# Altium PCB CH32FVx0xR-NFC-EVT-R0-1v2.PcbDoc
Units mil, origin at the board's own origin, x right, y up, seen from the top; angles counter-clockwise.
Board outline 2165.35 x 4488.19 mil, 2 copper layers (Top Layer, Bottom Layer); 75 components, 80 nets, 255 pads, 660 vias.
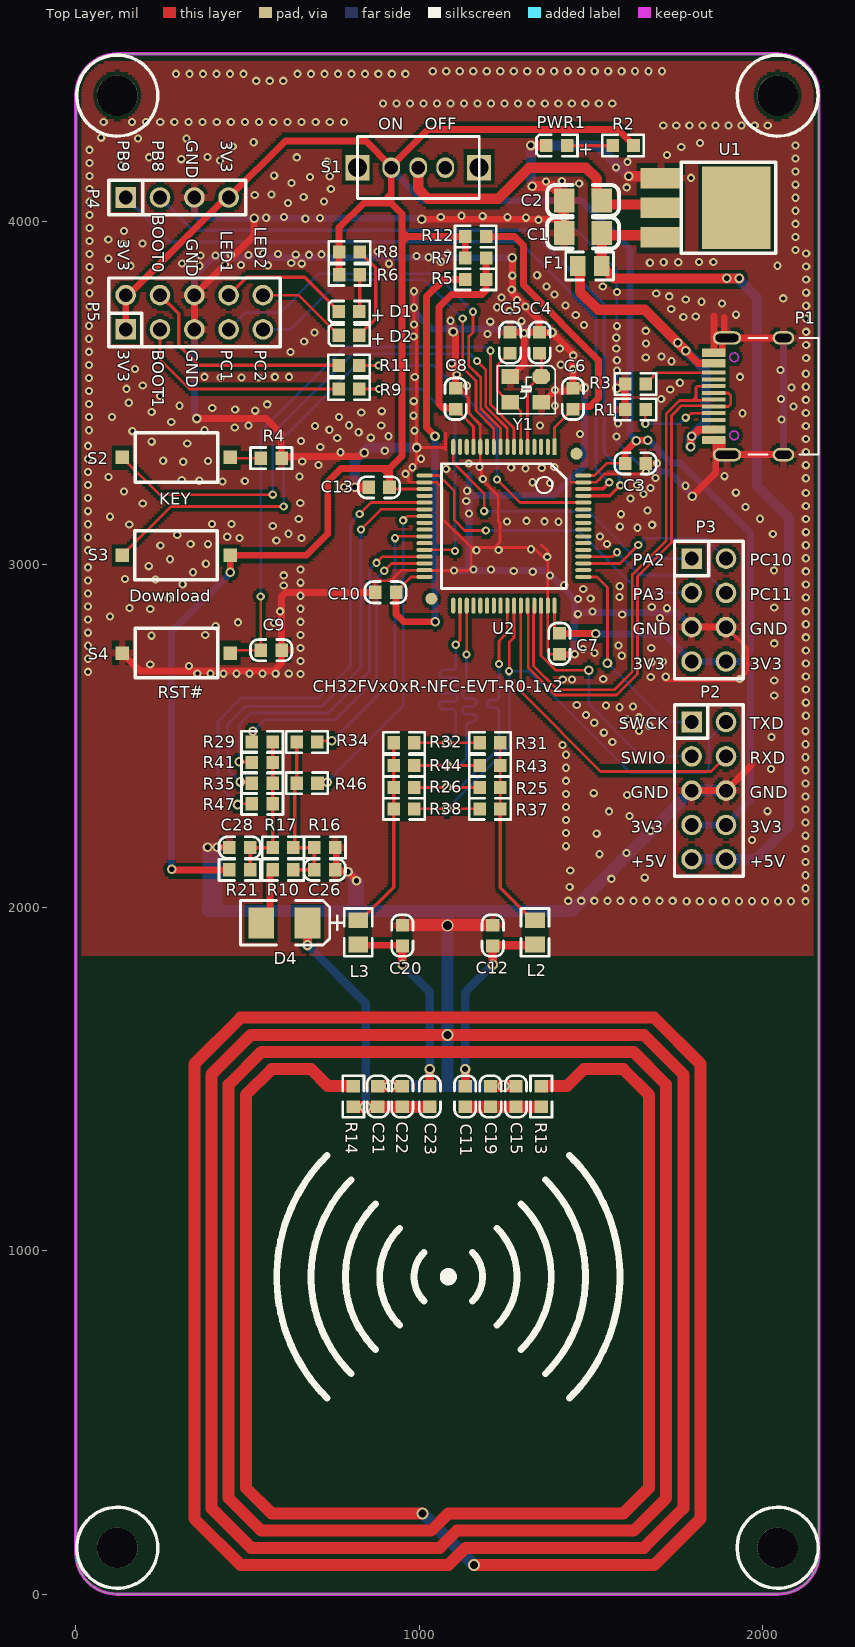
[diagram p0: Top Layer view]
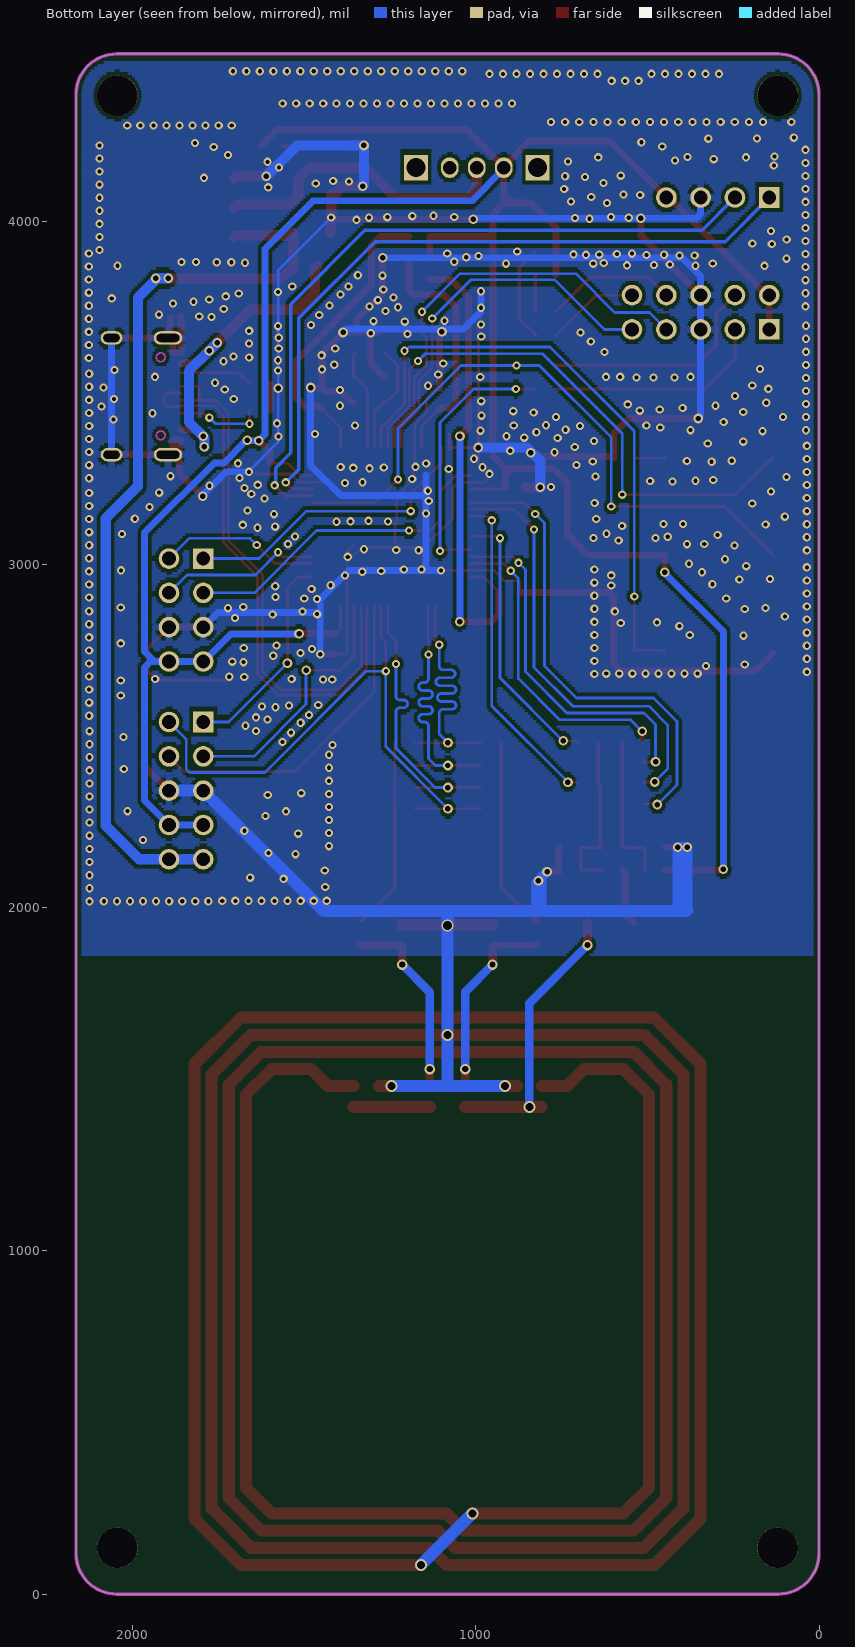
[diagram p1: Bottom Layer view, seen from below]

## Layer stack, top to bottom
Top Solder: solder mask 0.4, Solder Resist, Dk 3.5
Top Layer: signal copper 1.4
Dielectric 1: dielectric 12.6, FR-4, Dk 4.8
Bottom Layer: signal copper 1.4
Bottom Solder: solder mask 0.4, Solder Resist, Dk 3.5

## Board outline
0.08,118.11 0.08,4370.08 cw(c118.19,4370.08) 118.19,4488.19 118.11,4488.19 2047.16,4488.19 cw(c2047.16,4370.08) 2165.27,4370.08 2165.27,118.11 2165.43,118.11 cw(c2047.32,118.11) 2047.32,0 118.19,0 cw(c118.19,118.11)

## Design rules (kind name [scope] priority, off if disabled: settings)
Clearance Clearance_2 [InNet('ANT')or InNet('NetC16_2') vs InPolygon] p1: gap=6 ignorepadtopadclearanceinfootprint=FALSE
Clearance Clearance_1 [InPolygon] p2: gap=10 ignorepadtopadclearanceinfootprint=FALSE
Clearance [All] p3: gap=6 ignorepadtopadclearanceinfootprint=FALSE except(8: Arc-Via Track-Via SMDPad-Via THPad-Via Via-Via Via-Fill Via-Poly Via-Region Via-Hole)
ComponentClearance [All] p1 off: gap=10 collisioncheckmode=3 verticalgap=10 showdistances=FALSE
DiffPairsRouting [All] p1: maxlimit=10 minlimit=7 mostfreqgap=8 toplayer_minwidth=6 toplayer_maxwidth=15 toplayer_prefwidth=8 bottomlayer_minwidth=6 bottomlayer_maxwidth=15 bottomlayer_prefwidth=8 maxuncoupledlength=500
MinimumSolderMaskSliver [All] p1 off: minsoldermaskwidth=10
PolygonConnect PolygonConnect_1 [IsVia] p1: connectstyle=Direct reliefconductorwidth=10 reliefentries=4 polygonreliefangle="90 Angle" airgapwidth=10
PolygonConnect [All] p2: connectstyle=Relief reliefconductorwidth=20 reliefentries=4 polygonreliefangle="90 Angle" airgapwidth=10
RoutingVias [All] p1: holewidth=16 width=28 viastyle="Through Hole" minholewidth=12 minwidth=24 maxholewidth=28 maxwidth=50
SilkToSilkClearance [All] p1 off: silktosilkclearance=10
SilkToSolderMaskClearance [IsPad] p1 off: minsilkscreentomaskgap=10 clearancetoexposedcopper=TRUE
SolderMaskExpansion [All] p1: expansion=2 istentingtop=FALSE
Width [All] p1: maxlimit=100 minlimit=5 preferedwidth=10
25 further rules are at their usual default settings.

## Classes and differential pairs
component class CH32FVx0xR-NFC-EVT-R0-1v2: C1 C2 C3 C4 C5 C6 C7 C8 C9 C10 C11 C12 C13 C15 C19 C20 C21 C22 C23 C26 C28 D1 D2 D4 F1 L2 L3 P1 P2 P3 P4 P5 PWR1 R1 R2 R3 R4 R5 R6 R7 R8 R9 R10 R11 R12 R13 R14 R16 R17 R21 R25 R26 R29 R31 R32 R34 R35 R37 R38 R41 R43 R44 R46 R47 S1 S2 S3 S4 U1 U2 Y1
differential pair NewDifferentialPair2: +PA11 -PA12
differential pair NewDifferentialPair1: +PB6 -PB7

## Components (designator, comment, footprint, x,y, rotation, side; value= is the part's Value field where it differs from the comment)
C1 "10uF" 3216_C 1532.54,3966.48 r0 top
C2 "10uF" 3216_C 1532.54,4061.31 r0 top
C3 "0.1uF" 0603_C 1660.98,3295.06 r180 top
C4 "20pF" 0603_C 1351.2,3677.22 r270 top
C5 "20pF" 0603_C 1264.91,3677.22 r270 top
C6 "0.1uF" 0603_C 1448.21,3452.86 r90 top
C7 "0.1uF" 0603_C 1408.82,2738.85 r90 top
C8 "0.1uF" 0603_C 1106.47,3452.86 r90 top
C9 "0.1uF" 0603_C 599.29,2750.74 r180 top
C10 "0.1uF" 0603_C 872.19,2919.48 r0 top
C11 "30pF" 0603_C 1134.17,1480.3 r270 top
C12 "100pF" 0603_C 1214.69,1949.22 r270 top
C13 "0.1uF" 0603_C 853.03,3225.32 r0 top
C15 "NC" 0603_C 1282.07,1480.3 r270 top
C19 "220pf" 0603_C 1208.12,1480.3 r270 top
C20 "100pF" 0603_C 951.36,1888.59 r90 top
C21 "NC" 0603_C 879.67,1419.67 r90 top
C22 "220pf" 0603_C 951.17,1419.67 r90 top
C23 "30pF" 0603_C 1031.17,1480.3 r270 top
C26 "110pF" 0603_C 755.33,2110.47 r180 top
C28 "110p" 0603_C 447.23,2175.44 r0 top
D1 "BLUE" 0603+ 826.07,3737.33 r180 top
D2 "YELLOW" 0603+ 826.07,3668.79 r180 top
D4 "Diode BAS70WS" 3528+ 674.76,1956.12 r180 top
F1 "500mA" 0805 1461.97,3870.29 r0 top
L2 "1uH 300mΩ" 0805 1337.67,1963.2 r270 top
L3 "1uH 300mΩ" 0805 822.67,1963.2 r270 top
P1 "TYPE-C" TYPE-C-Receptacle-2.0 1859.06,3490.49 r90 top
P2 "LINK" IDC10-2.54mm 1794.35,2141.29 r0 top
P3 "Header 4X2" IDC8-2.54mm 1794.35,3017.7 r0 top
P4 "HEADER 4 母座" SIP4-2.54mm 144.94,4069.88 r90 top
P5 "HEADER 5x2" IDC10-2.54mm 544.94,3685.34 r90 top
PWR1 "POWER  red" 0603+ 1431.38,4221.23 r180 top
R1 "NC(5.1K)" 0603 1660.98,3451.94 r180 top
R2 "1K" 0603 1564.22,4221.23 r0 top
R3 "NC(5.1K)" 0603 1660.98,3526.41 r180 top
R4 "10K" 0603 599.29,3310.3 r180 top
R5 "0Ω" 0603 1134.49,3831.2 r0 top
R6 "1K" 0603 766.82,3844.68 r0 top
R7 "0Ω" 0603 1134.49,3893.73 r0 top
R8 "1K" 0603 766.82,3911.26 r0 top
R9 "10K" 0603 826.07,3511.91 r180 top
R10 "1kΩ" 0603 572.9,2110.47 r0 top
R11 "10K" 0603 765.44,3580.45 r0 top
R12 "0Ω" 0603 1134.49,3956.28 r0 top
R13 "1Ω(4.7Ω)" 0603 1356.02,1419.67 r90 top
R14 "1Ω(4.7Ω)" 0603 808.17,1419.67 r90 top
R16 "18K" 0603 755.33,2175.44 r180 top
R17 "27K" 0603 572.9,2175.44 r0 top
R21 "5100K" 0603 447.23,2110.47 r0 top
R25 "0Ω(NC)" 0603 1176.13,2350.38 r0 top
R26 "NC(0Ω)" 0603 925.76,2350.38 r0 top
R29 "NC(110k)" 0603 573.04,2483.02 r180 top
R31 "NC(0Ω)" 0603 1176.13,2480.8 r0 top
R32 "0Ω(NC)" 0603 925.76,2480.8 r0 top
R34 "20k(NC)" 0603 643.04,2483.02 r0 top
R35 "110k(NC)" 0603 573.04,2363.02 r180 top
R37 "NC(0Ω)" 0603 1176.13,2288.17 r0 top
R38 "NC(0Ω)" 0603 925.76,2288.17 r0 top
R41 "NC(110k)" 0603 573.04,2423.02 r180 top
R43 "NC(0Ω)" 0603 1176.13,2414.59 r0 top
R44 "NC(0Ω)" 0603 925.76,2414.59 r0 top
R46 "NC(20k)" 0603 643.36,2363.02 r0 top
R47 "NC(110k)" 0603 573.04,2303.02 r180 top
S1 "SW" SW1 997.5,4156.95 r180 top
S2 "KEY" SMD_6.1x3.65x2.5mm-KEY 134.73,3312.36 r0 top
S3 "Download" SMD_6.1x3.65x2.5mm-KEY 449.69,3027.36 r180 top
S4 "RST#" SMD_6.1x3.65x2.5mm-KEY 134.73,2742.35 r0 top
U1 "1117-3.3V" SOT-223 1704.58,4126.08 r270 top
U2 "CH32V203R" LQFP64M_10x10 1394.8,3343.25 r180 top
Y1 "13.56Mhz(27.12Mhz)-20pF" XT3225 1356.44,3547.86 r180 top
? "" HOLE 2044.83,4366.81 r0 top
? "" HOLE 120.36,4366.81 r0 top
? "Comment" HOLE 120.44,134.84 r0 top
? "Comment" HOLE 2044.91,134.84 r0 top

## Footprints (in the part's own frame and the unit in brackets; to place one, negate y for a bottom-side part, rotate by r counter-clockwise, add the part's x,y. Pads: shape width x height; smd on the part's side, far side on the other; paste and mask are expansions set on the pad)
0603 [mm]
  rect 0.93x0.98 smd: 1(0,0) 2(1.54,0)
  silkscreen extent -0.76,-0.79 2.3,0.79
0603+ [mm]
  rect 0.93x0.98 smd: 1(0,0) 2(1.54,0)
  silkscreen extent -0.76,-0.79 2.27,0.79
0603_C [mm]
  rect 0.93x0.98 smd mask+0.051: 1(0,0) 2(1.54,0)
  silkscreen extent -0.76,-0.79 2.31,0.79
0805 [mm]
  rect 1.16x1.47 smd: 1(0,0) 2(1.78,0)
  silkscreen extent -0.88,-1.04 2.66,1.03
3216_C [mil]
  rect 60x70 smd: 1(0,0) 2(-110,0)
  silkscreen extent -160,-45 50,45
3528+ [mil]
  rect 75x90 smd: 1(0,0) 2(135,0)
  silkscreen extent -102,-65 195,65
HOLE [mm]
  round 3 hole 3: 0(0,0)
  silkscreen extent -3,-3 3,3
IDC8-2.54mm [mil]
  rect 60x60 hole 40: 1(0,0)
  round 60 hole 40: 2(100,0) 3(0,-100) 4(100,-100) 5(0,-200) 6(100,-200) 7(0,-300) 8(100,-300)
  silkscreen extent -50,-350 150,50
IDC10-2.54mm [mil]
  rect 60x60 hole 40: 1(0,400)
  round 60 hole 40: 2(100,400) 3(0,300) 4(100,300) 5(0,200) 6(100,200) 7(0,100) 8(100,100) 9(0,0) 10(100,0)
  silkscreen extent -50,-50 150,450
LQFP64M_10x10 [mm]
  round 0.889 smd: 0(-1.619,0.508) 0(9.119,11.246)
  rect 0.3x1.2 smd mask+0.051: 1(0,0)
  oval 0.3x1.2 smd mask+0.051: 2(0.5,0) 3(1,0) 4(1.5,0) 5(2,0) 6(2.5,0) 7(3,0) 8(3.5,0) 9(4,0) 10(4.5,0) 11(5,0) 12(5.5,0) 13(6,0) 14(6.5,0) 15(7,0) 16(7.5,0) 33(7.5,11.754) 34(7,11.754) 35(6.5,11.754) 36(6,11.754) 37(5.5,11.754) 38(5,11.754) 39(4.5,11.754) 40(4,11.754) 41(3.5,11.754) 42(3,11.754) 43(2.5,11.754) 44(2,11.754) 45(1.5,11.754) 46(1,11.754) 47(0.5,11.754) 48(0,11.754)
  oval 1.2x0.3 smd mask+0.051: 17(9.627,2.127) 18(9.627,2.627) 19(9.627,3.127) 20(9.627,3.627) 21(9.627,4.127) 22(9.627,4.627) 23(9.627,5.127) 24(9.627,5.627) 25(9.627,6.127) 26(9.627,6.627) 27(9.627,7.127) 28(9.627,7.627) 29(9.627,8.127) 30(9.627,8.627) 31(9.627,9.127) 32(9.627,9.627) 49(-2.127,9.627) 50(-2.127,9.127) 51(-2.127,8.627) 52(-2.127,8.127) 53(-2.127,7.627) 54(-2.127,7.127) 55(-2.127,6.627) 56(-2.127,6.127) 57(-2.127,5.627) 58(-2.127,5.127) 59(-2.127,4.627) 60(-2.127,4.127) 61(-2.127,3.627) 62(-2.127,3.127) 63(-2.127,2.627) 64(-2.127,2.127)
  silkscreen extent -0.86,1.26 8.37,10.49
SIP4-2.54mm [mil]
  rect 60x60 hole 40: 1(0,0)
  round 60 hole 40: 2(0,-100) 3(0,-200) 4(0,-300)
  silkscreen extent -50,-350 50,50
SMD_6.1x3.65x2.5mm-KEY [mm]
  rect 1x1 smd: 1(0,0) 2(8,0)
  silkscreen extent 0.98,-1.83 7.08,1.83
SOT-223 [mil]
  rect 60x120 smd: 1(0,0) 2(86,0) 3(172,0)
  rect 240x200 smd: ""(86,220)
  silkscreen extent -47,60 219,335
SW1 [mm]
  rect 1.75x1.9 hole 1.4: 0(-4.5,0) 0(4.5,0)
  oval 1.321x1.524 hole 1.016: 1(0,0) 2(-2,0) 3(2,0)
  silkscreen extent -4.51,-2.31 4.5,2.29
TYPE-C-Receptacle-2.0 [mm]
  oval 1x1.6 hole 0.6 slot 1.2 at 90 deg: 0(-4.32,-5.15) 0(4.32,-5.15)
  oval 1x2.1 hole 0.6 slot 1.7 at 90 deg: 0(-4.32,-0.97) 0(4.32,-0.97)
  rect 0.6x1.75 smd mask+0.051: A1(-3.225,0) A4(-2.45,0) B1(3.225,0) B4(2.45,0)
  rect 0.3x1.75 smd mask+0.051: A5(-1.25,0) A6(-0.25,0) A7(0.25,0) A8(1.25,0) B5(1.75,0) B6(0.75,0) B7(-0.75,0) B8(-1.75,0)
  Keep-Out Layer circle w0.1: c2.89,-1.5 r0.325
  Keep-Out Layer circle w0.1: c-2.89,-1.5 r0.325
  silkscreen extent -4.32,-7.75 4.32,-2.55
XT3225 [mm]
  oct 1.3x1.1 smd: 1(0,0)
  rect 1.3x1.1 smd: 2(2.3,0) 3(2.3,1.9) 4(0,1.9)
  silkscreen extent -1.02,-0.8 3.27,2.74

## Part data
C1 C2 C9 C11 C12 C15 C19 C20 C21 C22 C23 C26 C28: library part CAP, "Capacitor"
C3 C4 C5 C6 C7 C8 C10 C13: library part Cap, "Capacitor"
D1 D2 PWR1: library part LED0, "Typical INFRARED GaAs LED", LatestRevisionDate=08-Jul-2005, LatestRevisionNote="Mech Layer 1 removed.", PackageReference=LED-0, Published=8-Jun-2000, Publisher="Altium Limited"
  D1 D2: PackageDescription="LED; 2 Leads"
D4: library part "Diode BAS70", "Silicon AF Schottky Diode for High-Speed Switching", ComponentLink1Description="Manufacturer Link", ComponentLink1URL=http://www.infineon.com/, ComponentLink2Description=Datasheet, ComponentLink2URL=http://www.infineon.com/upload/Document/cmc_upload/documents/009/382/bas40_bas140series_1.pdf, DatasheetVersion=Oct-1999, LatestRevisionDate=29-May-2009, LatestRevisionNote="IPC-7351 Footprint Added.", Note="Pin 2 is not connected and not drawn.", PackageDescription="3-Pin SOT-23 Package 0.95 mm Pitch, 2.5 mm Lead Span", PackageReference=SOT-23, PackageVersion=Sep-2001, Published=21-Mar-2003, Publisher="Altium Limited"
F1: library part FUSE1, "Fuse"
L2 L3: library part INDUCTOR
P1: library part TYPE-C1
P2: library part "Header 5X2H", "Header, 5-Pin, Dual row, Right Angle", LatestRevisionDate=17-Jul-2002, LatestRevisionNote="Re-released for DXP Platform.", Publisher="Altium Limited"
P3: "Header, 4-Pin, Dual row", LatestRevisionDate=17-Jul-2002, LatestRevisionNote="Re-released for DXP Platform.", Publisher="Altium Limited"
P4: library part "HEADER 4", "Header, 4-Pin"
P5: "Header, 5-Pin, Dual row"
R1 R3 R5 R7 R9 R11 R12: library part Res2, "Resistor"
R2: library part "Res Semi", "Semiconductor Resistor"
R4 R6 R8 R10 R13 R14 R16 R17 R21 R25 R26 R29 R31 R32 R34 R35 R37 R38 R41 R43 R44 R46 R47: library part RES
S2 S3 S4: library part KEY1
U2: "RISC-V HD-MCU, 10M Ethernet, 2*USB, CAN"
Y1: library part XTAL, "Crystal Oscillator", LatestRevisionDate=17-Jul-2002, LatestRevisionNote="Re-released for DXP Platform.", PackageReference=R38, Published=8-Jun-2000, Publisher="Altium Limited"

## Via types
v1: diameter 24, hole 12, Top Layer to Bottom Layer, tented both sides, 604 vias
v2: diameter 28, hole 16, Top Layer to Bottom Layer, tented both sides, 42 vias
v3: diameter 35.43, hole 23.62, Top Layer to Bottom Layer, tented both sides, 6 vias
v4: diameter 30, hole 18, Top Layer to Bottom Layer, tented both sides, 5 vias
v5: diameter 28, hole 16, Top Layer to Bottom Layer, 2 vias
v6: diameter 36, hole 26, Top Layer to Bottom Layer, tented both sides, 1 vias

## Nets (pads, with @x,y where several pads share a name; then routed paths per layer and width w, separated by ;. In a path a pad name is that pad's centre, name@x,y a point inside that pad or via, vN(x,y) a via of type N, cw(c..) or ccw(c..) an arc to the next point about the centre after c; other vN are vias at no path point)
3V3: C3.2 C7.2 C13.2 P2.7 P2.8 P3.7 P3.8 P4.4 P5.1 P5.2 R2.2 R6.1 R7.1 R8.1 R12.1 R21.1 S1.3 S3.1 U2.19 U2.48 U2.64 | length 9127
  Top Layer w8: C13.2 918.84,3220.14 U2.19 ; U2.48 1394.8,2813.49 C7.2 ; U2.64 1511.09,3259.51 1546.64,3295.06 C3.2
  Top Layer w20: P5.1 P5.2 152.67,3785.34 437.21,4069.88 P4.4 610.12,4235.06 844.65,4235.06 S1.3@918.76,4160.95 ; v2(278.76,2111.67) 279.96,2110.47 R21.1 ; v2(449.69,2977.62) S3.1 672.05,3027.36 733.58,3088.89 733.58,3241.22 772.33,3279.97 895.47,3279.97 ; R6.1 R8.1 766.82,3982.15 838.78,4054.11 893.27,4054.11 ; C13.2 913.66,3261.78 ; R7.1 R12.1 964.34,3956.28 ; C7.2 1514.04,2799.48 v2(1515.33,2798.2) ; C3.2 1600.35,3328.21 v2(1633.23,3361.09) 1634.65,3362.51 v2(1666.27,3362.51) ; R2.2 1624.85,4222.22 1579.38,4267.69 1025.49,4267.69 S1.3@918.76,4160.95 ; 893.27,4054.11 918.76,4054.11 ; 893.27,4054.11 918.76,4079.6 ; 895.47,3279.97 913.66,3279.97 ; 895.47,3279.97 913.66,3261.78 ; 913.66,3261.78 913.66,3279.97 ; 913.66,3279.97 950.47,3316.78 950.47,3940.9 ; 918.76,4054.11 918.76,4079.6 ; 918.76,4054.11 950.47,4022.4 950.47,3970.15 ; 918.76,4079.6 S1.3 S1.3@918.76,4160.95 ; 950.47,3940.9 950.47,3956.28 ; 950.47,3940.9 964.34,3954.77 964.34,3956.28 ; 950.47,3956.28 950.47,3970.15 ; 950.47,3956.28 964.34,3956.28 ; 950.47,3970.15 964.34,3956.28
  Bottom Layer w20: v2(278.76,2111.67) 278.76,2804.52 449.69,2975.45 v2(449.69,2977.62) ; S1.3 918.76,4152.95 1011.46,4060.25 1474.75,4060.25 1614.56,3920.43 1614.56,3379.75 v2(1633.23,3361.09) 1669.75,3361.09 1734.38,3296.45 1762.28,3296.45 1965.29,3093.44 1965.29,2746.38 1936.61,2717.7 ; v2(1515.33,2798.2) 1713.86,2798.2 P3.7 P3.8 1936.61,2717.7 ; P2.7 P2.8 1965.29,2312.22 1965.29,2700.06 1947.65,2717.7 1936.61,2717.7
5V_in: F1.1 P1.A4 P1.B4 | length 1015.1
  Top Layer w22: v2(1777.46,3623.1) 1813.62,3586.95 P1.B4 ; v2(1791.05,3343.34) 1791.05,3369.98 v2@1794.62,3373.56 ; v2(1794.08,3373.56) v2@1794.62,3373.56 ; P1.A4 1858.25,3393.23 1814.29,3393.23 v2@1794.62,3373.56
  Top Layer w30: F1.1 1468.74,3863.52 1468.74,3795.79 1521.85,3742.68 1657.88,3742.68 v2(1754.13,3646.43) v2(1777.46,3623.1)
  Bottom Layer w30: v2(1754.13,3646.43) v2(1777.46,3623.1) 1836.19,3564.38 1836.19,3415.66 v2(1794.08,3373.56) 1791.05,3370.52 v2(1791.05,3343.34)
+5V: C1.1 F1.2 P2.9 P2.10 U1.3 | length 2712.7
  Top Layer w30: U1.3 1698.38,3960.28 1538.74,3960.28 C1.1 1532.29,3966.24 1532.29,3870.53 F1.2 1532.05,3864.18 1539.89,3856.35 1545.99,3856.35 1568.44,3833.9 v2(1933.13,3833.9)
  Bottom Layer w22: P2.9 P2.9@1810.82,2141.29
  Bottom Layer w30: P2.9@1810.82,2141.29 1981.55,2141.29 2078.92,2238.66 2078.92,3134.52 1984.78,3228.66 1984.78,3778.33 v2@1933.13,3829.98 ; v2(1896.23,3834.86) 1928.25,3834.86 v2@1933.13,3829.98 ; v2(1933.13,3833.9) v2@1933.13,3829.98
ANT_OUT_0: L2.1 R25.2 R31.2 R37.2 R43.2 | length 563
  Top Layer w8: R37.2 R25.2 R43.2 R31.2
  Top Layer w10: R37.2 1236.76,2058.01 1331.57,1963.2 L2.1
ANT_OUT_1: L3.1 R26.1 R32.1 R38.1 R44.1 | length 563.9
  Top Layer w10: L3.1@828.78,1963.2 925.76,2060.19 R38.1 R26.1 R44.1 R32.1
  Top Layer w20: L3.1 L3.1@828.78,1963.2
BOOT0: R11.2 S3.2 U2.60 | length 1998.7
  Top Layer w8: S3.2 276.96,3169.58 v1(605.32,3169.58) ; R11.2 v1(881.95,3580.45) ; v1(1227.02,3248.2) 1294.44,3180.77 U2.60
  Bottom Layer w8: v1(605.32,3169.58) 605.32,3370.41 815.36,3580.45 v1(881.95,3580.45) 1042.78,3580.45 1227.02,3396.21 v1(1227.02,3248.2)
BOOT1: R9.1 U2.28 | length 786.9
  Top Layer w8: R9.1 829.86,3508.12 833.4,3511.66 v1(883.47,3511.66) ; U2.28 1016.31,3043.5 1100.63,3043.5 v1(1104.55,3039.57)
  Bottom Layer w8: v1(883.47,3511.66) 1006.63,3511.66 1104.36,3413.94 1104.36,3039.76 v1(1104.55,3039.57)
GND: C1.2 C2.2 C3.1 C4.1 C5.1 C6.2 C7.1 C8.2 C9.1 C10.1 C12.1 C13.1 C15.1 C19.1 C20.2 C21.2 C22.2 C26.1 C28.1 P1.0 P1.A1 P1.B1 P2.5 P2.6 P3.5 P3.6 P4.3 P5.5 P5.6 PWR1.2 R1.2 R3.2 R4.1 R13.2 R14.2 R16.1 S4.1 U1.1 U2.12 U2.18 U2.31 U2.47 U2.63 Y1.2 Y1.4 | length 39181.8
  Top Layer w8: C10.1@871.86,2919.15 C10.1 872.19,2948.04 876.88,2952.72 917.03,2952.72 948.23,2983.92 U2.31 1016.71,2982.99 v1(1101.48,2982.99) 1142.39,2982.99 1152.32,2992.93 1152.32,3049.6 ; v1(984.88,3796.81) v1(984.88,3748.48) v1(984.88,3700.15) 992.6,3692.43 992.6,3434.13 v2(992.6,3341.23) ; 1076.9,3383.21 1076.9,3334.51 1070.18,3341.23 v2(992.6,3341.23) ; C8.2@1116.45,3513.49 1130.76,3499.18 1130.76,3498.69 1143.64,3485.81 1143.64,3442.25 1178.27,3407.62 U2.12 1178.27,3287.61 v1(1175.63,3284.97) ; v1@1182.05,3284.97 1182.05,3252.92 v1(1185.68,3249.29) 1185.68,3245.39 1230.68,3200.39 1230.68,3126.26 1235.46,3121.47 1235.46,3065.55 1219.51,3049.6 ; 1356.74,3057.53 1375.12,3039.15 1375.12,3007.95 ; C7.1 1381.75,2738.85 1375.12,2745.48 U2.47 1375.12,3007.95 ; 1441.64,3239.82 U2.63 1515.45,3239.82 1539.72,3264.09 1644.01,3264.09 1648.69,3268.78 ; v2(992.6,3341.23) 992.6,3295.77 v1(980.75,3283.92) 968.91,3272.07 968.91,3244.51 973.59,3239.82 U2.18 1051.87,3239.82 1068.37,3223.32 1068.37,3133.54 1152.32,3049.6 ; 1152.32,3049.6 1219.51,3049.6 ; 1219.51,3049.6 1333.48,3049.6 1375.12,3007.95
  Top Layer w10: v1@1717.57,2662.59 1934.58,2662.59 1936.74,2662.59 1936.74,2669.19 1956.14,2688.6 1956.14,2755.91 P3.6
  Top Layer w20: S4.1 187.04,2690.05 353.65,2690.05 576.61,2690.05 599.29,2712.74 C9.1 599.29,2907.43 611.01,2919.15 C10.1@871.86,2919.15 ; P5.5 P5.6 519.15,3959.54 v2(519.15,4009.41) ; v2(351.79,3425.84) 554.44,3425.84 598.25,3382.02 598.25,3311.34 R4.1 603.96,3314.97 826.67,3314.97 837.73,3326.02 v2(839.89,3326.02) ; v2@382.65,2177.01 v2(383.44,2176.23) C28.1@446.44,2176.23 ; v2@410.69,2177.01 v2(411.47,2176.23) C28.1@446.44,2176.23 ; C28.1 C28.1@446.44,2176.23 ; R16.1 758.47,2172.3 758.47,2104.38 760,2105.91 791.12,2105.91 v2(792.65,2104.38) 817.57,2079.47 v2(817.57,2079.24) ; v2(1008.05,4006.63) 1009.05,4005.63 1010.05,4006.63 1415.78,4006.63 1420.64,4011.48 v1(1421.72,4011.48) ; C8.2 v2@1106.47,3678.44 ; Y1.2 1269.83,3547.86 1306.23,3584.27 v1(1306.23,3674.24) ; v2(1271.77,3894.2) v1(1271.77,3842.09) 1271.77,3789.97 1288.31,3773.43 1347.93,3713.81 1347.93,3680.5 C4.1@1350.7,3677.72 ; C5.1@1278.91,3677.22 1279.4,3677.72 C4.1@1350.7,3677.72 ; C4.1@1351.2,3677.72 C4.1@1350.7,3677.72 ; Y1.4 1360.38,3473.06 1392.5,3505.18 1439.91,3505.18 C6.2 v1(1448.21,3569.05) 1448.21,3609.88 1448.62,3610.29 1448.62,3611.73 1447.39,3612.97 1447.39,3616.33 v2(1387.15,3676.56) 1386.82,3676.89 1351.53,3676.89 C4.1 C4.1@1350.7,3677.72 ; C7.1 v1(1453.63,2738.85) ; C6.2@1449.5,3514.78 1480.42,3514.78 v2(1481.71,3516.07) ; v2(1576.38,3513.49) 1588.41,3513.49 R3.2@1600.35,3525.43 ; R1.2 R3.2@1600.35,3525.43 ; R3.2 R3.2@1600.35,3525.43 ; P2.5 P2.6 1969.41,2416.35 ; P3.5 P3.6 ; v2(1796.36,3199.57) 1864.46,3267.67 P1.A1@1864.46,3363.52 ; P1.A1 P1.A1@1864.46,3363.52 ; 1859.06,3724.57 P1.B1 1881.7,3617.46 1883.51,3619.27 1883.51,3651.62 1892.46,3660.57 P1.0@1897.25,3660.57 ; 1889.48,3720.36 1889.48,3668.35 P1.0@1897.25,3660.57 ; P1.0@2061.82,3320.41 1897.25,3320.41 1892.46,3320.41 1883.51,3329.36 1883.51,3361.71 1881.7,3363.52 P1.A1@1864.46,3363.52 ; P1.0@2061.82,3660.57 P1.0@1897.25,3660.57
  Top Layer w30: v2(812.58,3225.05) 852.75,3225.05 C13.1 ; v2(1326.08,4221.54) 1370.45,4221.54 PWR1.2 ; v2(1330.01,4103.19) 1389.96,4103.19 1407.54,4085.62 1407.54,4081.31 1407.7,4081.15 1421.72,4081.15 v1(1421.72,4011.48) ; C1.2 v1@1422.54,4011.48 ; v2(1610.58,4131.59) 1699.06,4131.59 U1.1
  Top Layer w35: R14.2 734.54,1480.3 685.17,1529.67 570.17,1529.67 495.17,1454.67 495.17,309.67 570.17,234.67 v3(1010.17,234.67) ; C21.2 v3(915.42,1480.3) C22.2 ; C20.2 C12.1 ; v3(1160.17,84.67) 1685.17,84.67 1820.17,219.67 1820.17,1544.67 1685.17,1679.67 480.17,1679.67 345.17,1544.67 345.17,219.67 480.17,84.67 1085.17,84.67 1135.17,134.67 1655.17,134.67 1770.17,249.67 1770.17,1514.67 1655.17,1629.67 v3(1082.67,1629.67) 510.17,1629.67 395.17,1514.67 395.17,249.67 510.17,134.67 1060.17,134.67 1110.17,184.67 1625.17,184.67 1720.17,279.67 1720.17,1484.67 1625.17,1579.67 540.17,1579.67 445.17,1484.67 445.17,279.67 540.17,184.67 1035.17,184.67 1085.17,234.67 1595.17,234.67 1670.17,309.67 1670.17,1454.67 1595.17,1529.67 1480.17,1529.67 1430.8,1480.3 R13.2 ; C19.1 C15.1
  Bottom Layer w8: v1(1421.72,4011.48) 1576.14,3857.06 1576.14,3694.86 1576.14,3629.92 1576.14,3513.49 1576.14,3357.04 1660.98,3272.2 v1(1660.98,3270.45)
  Bottom Layer w20: P4.3 344.94,4021.13 356.66,4009.41 v2(519.15,4009.41) 1005.27,4009.41 v2(1008.05,4006.63) ; v2(351.79,3425.84) 344.94,3432.68 P5.5 P5.6 344.94,3840.71 398.43,3894.2 434.65,3894.2 480.69,3894.2 589.09,3894.2 640.57,3894.2 679.28,3894.2 992.18,3894.2 v2(1271.77,3894.2) ; v1(984.88,3796.81) v1(984.88,3748.48) 984.88,3737.95 1036.39,3686.44 1377.27,3686.44 v2(1387.15,3676.56) ; v1(1101.48,2982.99) 1145.6,2982.99 ; 1145.6,3261.41 v1@1145.6,3189.41 ; v1(1453.63,2738.85) v1@1453.63,2860.25 ; v2(1481.71,3516.07) 1481.71,3289.38 1393.45,3201.12 1157.32,3201.12 v1@1145.6,3189.41 ; v1(1660.98,3270.45) 1727.93,3270.45 1768.63,3229.76 v1(1776.57,3229.76) ; v1@1771.08,3227.31 1796.36,3202.02 v2(1796.36,3199.57) ; P3.5 1751.8,2860.25 1504.99,2860.25 v1@1453.63,2860.25 ; P1.0@2061.82,3320.41 P1.0@2061.82,3660.57 ; 1145.6,2982.99 1369.48,2982.99 1453.63,2898.84 v1@1453.63,2860.25 ; 1145.6,2982.99 v1@1145.6,3189.41
  Bottom Layer w30: 383.44,1993.76 v2(383.44,2176.23) v2(411.47,2176.23) 411.47,1992.88 409.56,1990.97 ; v2(792.65,2104.38) 808.52,2088.52 808.52,1990.97 ; v2(812.58,3225.05) 812.58,3302.39 851.42,3341.23 v2(992.6,3341.23) ; v2(817.57,2079.24) 824.77,2072.03 824.77,1990.97 ; v2(1330.01,4103.19) 1326.08,4107.12 v2(1326.08,4221.54) 1520.64,4221.54 v2(1610.58,4131.59)
  Bottom Layer w35: 383.44,1993.76 386.23,1990.97 409.56,1990.97 808.52,1990.97 824.77,1990.97 1082.67,1990.97 ; v3(915.42,1480.3) 1082.67,1480.3 ; v3(1010.17,234.67) v3(1160.17,84.67) ; v3@1245.65,1480.3 1082.67,1480.3 ; P2.6 P2.5 1444.03,1990.97 1082.67,1990.97 ; 1082.67,1480.3 v3(1082.67,1629.67) v6(1082.67,1948.12) 1082.67,1990.97
  other v1: 1779.67,2018.9 1817.73,2018.9 1855.79,2018.9 1893.86,2018.9 1931.92,2018.9 1969.98,2018.9 2008.05,2018.9 2046.11,2018.9 2084.17,2018.9 2126.02,2018.78 1434.5,2020.23 1472.56,2020.23 1510.62,2020.23 1548.69,2020.23 1586.75,2020.23 1624.81,2020.23 1662.88,2020.23 1700.94,2020.23 1739,2020.23 2126.02,2056.84 1438.8,2060.35 1560.21,2084.29 1657.69,2087.71 2126.02,2094.91 1440.51,2108.23 2126.02,2132.97 1526.01,2156.11 1604.68,2159.53 2126.02,2171.03 1427.92,2179.55 1970.07,2197.84 2126.02,2210.19 1517.46,2215.97 1427.92,2217.62 1674.79,2224.52 2126.02,2248.26 1427.92,2255.68 1613.23,2267.27 1553.37,2280.95 2014.94,2281.59 2126.02,2286.32 1427.92,2293.74 2126.02,2324.38 1606.39,2328.84 1427.92,2331.81 1508.91,2333.97 2126.02,2362.45 1427.92,2369.87 2126.02,2400.51 2025.91,2404.23 1427.92,2407.93 2126.02,2438.57 1427.92,2446 1418.06,2474.19 2126.02,2476.64 1563.17,2483.02 2026.91,2497.95 1538.43,2510.36 1640.57,2514.96 2126.02,2514.7 1671.03,2530.56 1510.52,2539.13 1607.19,2548.91 1641.09,2554.99 2126.99,2559.65 1486.07,2561.57 1583.74,2584.37 1623.5,2586.5 1544.36,2589.36 1459.47,2590.74 2126.99,2597.71 2034.88,2618.77 2126.99,2635.78 2034.88,2662.46 1418.51,2665.39 1445.74,2665.39 1536.79,2666.51 1934.58,2667.03 1674.99,2672.55 1718.64,2673.3 2126.99,2673.84 654.69,2680.93 353.65,2682.24 391.71,2682.24 429.77,2682.24 467.84,2682.24 505.9,2682.24 543.96,2682.24 582.03,2682.24 620.09,2682.24 35.41,2687.49 329.1,2704.46 216.51,2708.86 2126.99,2711.91 1677,2715.78 1710.08,2717.19 654.69,2718.99 35.41,2725.55 1590.52,2734.42 1510.97,2742.49 2126.99,2749.97 1477.68,2754.16 654.69,2757.06 1676.49,2756.99 35.41,2763.62 1581.19,2764.27 2034.88,2770.58 2126.99,2788.03 219.98,2792.88 376.77,2794.61 654.69,2795.12 35.41,2801.68 407.08,2820.6 2126.99,2826.1 577.73,2830.13 472.05,2831.86 654.69,2833.18 35.41,2839.74 1701.84,2844.45 99.57,2849.19 1592.12,2854.42 1462.56,2855.63 1504.99,2863.11 595.06,2863.91 2126.99,2864.16 216.51,2870.84 654.69,2871.25 155.88,2873.44 1722.73,2873.16 2034.88,2874.95 1677.87,2876.57 35.41,2877.81 1463.02,2900 270.23,2900.89 1499.99,2901.05 2126.99,2904.29 1584.17,2905.53 654.69,2909.31 35.41,2915.87 1478.53,2929 1584.75,2936.9 605.45,2939.28 1423.13,2939.9 2126.99,2942.35 310.93,2942.74 654.69,2947.37 35.41,2953.93 232.1,2956.6 142.88,2958.33 1381.19,2968.03 605.45,2968.73 341.21,2977.6 1331.07,2979.28 2126.99,2980.41 1275.83,2981.32 2034.38,2983.32 654.69,2985.44 1158.7,2985.42 1209.85,2985.42 35.41,2992 212.18,2995.58 378.5,3002.51 273.68,3015.5 2126.99,3018.48 1373.52,3022.75 35.41,3041.68 1166.79,3042.02 1231.88,3042.96 1325.95,3044.75 245.96,3055.35 2126.99,3056.54 334.34,3060.03 384.56,3059.68 1547.34,3059.99 583.93,3070.34 657.21,3077.21 476.38,3077.87 35.41,3079.74 440.87,3081.34 1527.33,3082.29 295.34,3086.54 2030.92,3089.22 619.43,3089.8 2126.99,3094.6 1636.13,3107.51 1584.98,3110.64 573.63,3112.7 1679.27,3115.91 155.38,3116.96 35.41,3117.81 396.17,3118.43 453.41,3118.43 1256.39,3125.56 1406.25,3125.05 1365.33,3126.07 1313.16,3127.6 649.2,3133.31 2126.99,3132.67 1993.85,3133.68 99.58,3139.79 1588.29,3147.02 1145.29,3148.67 35.41,3155.87 1665.69,3157.78 1951.09,3167.54 2126.99,3170.73 194.69,3177.84 653.78,3179.96 1137.47,3185.41 1616.2,3192.92 35.41,3193.93 1654.31,3205.96 2126.99,3208.79 1922.99,3209.69 140.16,3213.35 1140.06,3215.3 1674.37,3223.51 781.25,3225.97 35.41,3232 1635.75,3232.54 1381.34,3237.66 1330.17,3240.06 426.97,3242.19 359.57,3244.5 492.07,3243.92 308.3,3246.23 2126.98,3251.81 1688.87,3252.79 94.5,3255.2 651.26,3256.49 1889.72,3257.75 960.62,3264.49 35.41,3270.06 1078.88,3278.91 1309.82,3280.61 1357.31,3281.97 1268.21,3283.32 1393.95,3284.68 706.73,3290 2126.98,3289.88 1144.85,3294.69 1693.29,3295.12 312.82,3299.78 659.35,3300.4 385.16,3302.07 254.19,3302.83 35.41,3308.12 1005.34,3308.7 770.87,3327.56 2126.98,3327.94 899.74,3331.97 711.98,3343.04 35.41,3346.19 324.24,3353.09 220.68,3358.42 655.88,3359.92 2126.98,3366 761.56,3368.89 859.13,3369.94 1575.35,3373.06 910.81,3374.16 1469.19,3380.45 823.79,3385.76 164.34,3388.87 986.84,3390.43 38.14,3391.76 374.49,3391.92 738.35,3393.15 462.82,3399.53 696.9,3403.83 2126.98,3404.07 889.72,3405.28 1352.33,3405.44 503.18,3405.63 795.84,3406.33 1579.57,3411.67 277.79,3415.53 2056.27,3423.29 38.14,3429.82 104.94,3429.99 766.25,3429.84 983.75,3434.13 1942.58,3441.14 2126.98,3442.13 831.54,3443.13 220.68,3444.46 891.06,3447.17 522.43,3448.76 464.03,3452.1 397.29,3456.27 2091.04,3460.87 301.35,3462.94 1396.03,3463.12 557.47,3467.11 38.14,3467.89 153.67,3471.87 984.27,3476.28 2126.98,3480.19 2054.39,3482.48 1705.44,3483.01 244.62,3491.31 38.14,3505.95 1396.03,3508.71 1731.95,3510.26 147.58,3512.23 2085.4,3516.31 2126.98,3518.26 1139.76,3521.12 194.57,3522.17 1759.94,3530.15 38.14,3544.01 421.11,3544.99 482.08,3545.56 532.22,3545.56 374.39,3547.27 579.52,3547.27 620.54,3547.27 987.16,3546.75 1935.06,3547.32 1109.72,3553.79 2126.98,3556.32 1576.89,3565.5 2053.45,3567.05 172.04,3569.73 38.14,3582.08 1412.84,3582.42 1095.11,3585.8 1735.41,3592.75 1576.31,3595.67 2127.95,3602.24 1660.65,3603.96 1706.04,3606.63 1449.39,3609.88 625.1,3619.3 38.14,3620.14 1409.76,3630.17 1574.57,3629.92 2127.95,3640.3 1661.19,3644.54 664.99,3650.04 38.14,3658.21 1574.57,3661.25 984.22,3665.04 1199.16,3671.78 694.9,3676.63 2127.95,3678.37 1660.65,3681.39 1576.88,3694.86 38.14,3696.27 1480.69,3698.55 1207.27,3708.01 1298.2,3709.53 1091.43,3710.76 2127.95,3716.43 1770.08,3721.44 1806.06,3723.18 1456.39,3727.81 1923.29,3728.4 1263.53,3739 1734.68,3744.65 1226.82,3749.97 1309.85,3751.89 39.51,3752.79 2127.95,3754.49 1426.49,3755.35 1882.66,3760.9 1822.89,3766.13 1285.61,3770.73 1777.04,3772.51 2061.14,3776.01 1240.17,3778.57 1728.87,3781.8 1394.52,3787.32 1691.15,3790.5 39.51,3790.85 2127.95,3792.56 1576.95,3794.63 1269.73,3801.4 1371.19,3810.65 1535.26,3810.84 39.51,3828.91 2127.95,3830.62 1343.99,3843.17 39.51,3866.98 2127.95,3868.69 159.17,3870.75 359.78,3870.92 2044.63,3870.93 559.25,3872.15 480.69,3873.38 434.65,3874.6 309.56,3877.51 658.07,3877.06 911.89,3877.02 627.38,3878.9 1672.45,3879.63 1712.65,3881.08 1755.29,3881.08 1857.5,3881.57 1062.92,3882.54 1815.84,3882.05 95.04,3891.63 1027.94,3895.65 992.18,3899.13 362.38,3900.57 406.89,3900.67 502.79,3902.19 451.3,3903.2 640.57,3903.28 679.28,3902.78 715.47,3904.29 39.51,3905.04 589.09,3905.22 545.18,3906.22 1083.39,3907 2127.95,3906.75 879.41,3912.52 2097.06,3916.95 137.54,3934.13 194.21,3935.62 39.51,3943.1 94.3,3947.55 2097.06,3955.01 139.78,3972.16 39.51,3981.17 2097.06,3993.08 1347.97,4004.78 668.5,4007.79 711.46,4010.25 554.34,4010.86 1311.37,4011.06 1257.95,4012.53 605.9,4012.7 1063.01,4013.21 1185.21,4015.51 1123.8,4016.7 39.51,4019.23 2097.06,4031.14 618.17,4053.82 39.51,4057.3 722.51,4058.12 2097.06,4069.2 663.59,4071.62 521.2,4077.15 569.69,4078.37 39.52,4094.67 742.77,4094.95 1605.2,4099.43 2097.06,4107.27 1466.54,4110.31 627.99,4112.13 1369.83,4116.37 1415.97,4118.16 1792.32,4127.17 682,4129.32 739.7,4131.77 39.52,4132.73 577.66,4133.61 2097.06,4145.33 1573.92,4157.27 131.68,4163.13 39.52,4170.8 1607.56,4173.8 731.72,4174.74 419.39,4177.95 306.8,4181.68 2097.06,4183.39 212.85,4186.9 643.34,4187.01 383.6,4187.64 130.09,4189.13 1722.08,4193.87 39.52,4208.86 1763.99,4216.89 456.67,4218.21 2097.06,4221.46 1818.88,4228.7 517.82,4230.89 322.46,4241.33 180.79,4242.07 73.42,4244.31 1711.46,4279.38 1749.52,4279.38 1787.58,4279.38 1825.65,4279.38 1863.71,4279.38 1901.77,4279.38 1939.84,4279.38 1977.9,4279.38 2015.97,4279.38 80.71,4290.14 163.09,4290.14 204.28,4290.14 245.47,4290.14 286.66,4290.14 327.85,4290.14 369.04,4290.14 410.23,4290.14 451.42,4290.14 492.61,4290.14 533.8,4290.14 574.99,4290.14 616.18,4290.14 657.37,4290.14 698.57,4290.14 739.76,4290.14 780.95,4290.14 894.68,4343.58 934,4343.58 973.32,4343.58 1012.63,4343.58 1051.95,4343.58 1091.26,4343.58 1130.58,4343.58 1169.89,4343.58 1209.21,4343.58 1248.53,4343.57 1287.84,4343.57 1327.16,4343.57 1366.47,4343.57 1405.79,4343.57 1445.11,4343.57 1484.42,4343.57 1523.74,4343.57 1563.05,4343.57 525.57,4409.8 564.88,4409.8 604.2,4409.8 291.55,4430.29 330.86,4430.29 370.18,4430.29 409.49,4430.29 448.81,4430.29 488.12,4430.29 645.39,4430.29 684.7,4430.29 724.02,4430.29 763.33,4430.29 802.65,4430.29 841.97,4430.29 881.28,4430.29 920.6,4430.29 959.91,4430.29 1039.82,4437.75 1079.13,4437.75 1118.45,4437.75 1157.76,4437.75 1197.08,4437.75 1236.39,4437.75 1275.71,4437.75 1315.03,4437.75 1354.34,4437.75 1393.66,4437.75 1432.97,4437.75 1472.29,4437.75 1511.61,4437.75 1550.92,4437.75 1590.24,4437.75 1629.55,4437.75 1668.87,4437.75 1708.18,4437.75
  other v2: 1098.8,3678.44
  other v3: 1245.65,1480.83
LED1: D1.2 P5.8 | length 384.2
  Top Layer w10: P5.8 497.16,3837.56 666.19,3837.56 765.44,3738.31 D1.2
LED2: D2.2 P5.10 | length 269.3
  Top Layer w8: P5.10 648.9,3785.34 750.15,3684.09 751.13,3684.09 765.44,3669.78 D2.2
NetC2_1: C2.1 S1.1 U1.2 | length 895.4
  Top Layer w30: S1.1 997.5,4095 1025.89,4066.61 1230.65,4066.61 1321.04,4157 1485.98,4157 1517.54,4125.45 1517.54,4076.31 1544.52,4049.33 1695.33,4049.33 U1.2
NetC11_1: C11.1 C12.2 L2.2 | length 566.5
  Top Layer w25: C11.1 v4(1134.17,1529.67) ; v4(1214.69,1834.22) C12.2 1216.96,1890.86 1335.41,1890.86 L2.2
  Bottom Layer w25: v4(1134.17,1529.67) 1134.17,1753.7 v4(1214.69,1834.22)
NetC11_2: C11.2 C15.2 C19.2 R13.1 | length 221.8
  Top Layer w35: C11.2 C15.2 R13.1
NetC20_1: C20.1 C23.1 L3.2 | length 574.2
  Top Layer w20: L3.2 824.94,1890.86 949.1,1890.86 C20.1
  Top Layer w25: v4(951.36,1834.22) C20.1 ; C23.1 v4(1031.17,1529.67)
  Bottom Layer w25: v4@949.73,1835.86 1031.17,1754.41 v4(1031.17,1529.67)
NetC21_1: C21.1 C22.1 C23.2 D4.1 R14.1 | length 829.5
  Top Layer w25: v4(674.76,1891.12) D4.1
  Top Layer w35: R14.1 v3(843.92,1419.67) C21.1 C22.1 C23.2
  Bottom Layer w25: v4(674.76,1891.12) 843.92,1721.96 v3(843.92,1419.67)
NetD1_1: D1.1 R6.2 | length 107.9
  Top Layer w10: D1.1 827.45,3738.7 R6.2
NetD2_1: D2.1 R8.2 | length 280.9
  Top Layer w10: D2.1 826.07,3669.78 873.16,3716.86 873.16,3864.57 827.45,3910.28 R8.2
NetD4_2: D4.2 R10.1 | length 168.1
  Top Layer w20: D4.2 565.43,1981.79 565.43,2103.01 R10.1
NetP1_A5: P1.A5 R1.1 | length 252.1
  Top Layer w8: v1(1659.39,3410.63) R1.1@1659.39,3450.34 ; v1(1776.75,3428.23) 1781.08,3428.23 1794.12,3441.28 P1.A5
  Bottom Layer w8: v1(1659.39,3410.63) 1759.15,3410.63 v1(1776.75,3428.23)
NetP1_B5: P1.B5 R3.1 | length 212.3
  Top Layer w8: R3.1 1660.98,3527.4 1675.29,3541.7 1676.27,3541.7 1693.96,3559.39 P1.B5
NetP5_3: P5.3 R9.2 | length 643.6
  Top Layer w8: P5.3 244.94,3597.82 330.84,3511.91 R9.2
NetP5_4: P5.4 R11.1 | length 659
  Top Layer w10: P5.4 299.06,3731.21 299.06,3639.67 358.28,3580.45 R11.1
NetPWR1_1: PWR1.1 R2.1 | length 132.8
  Top Layer w10: PWR1.1 R2.1
NetR4_2: R4.2 S2.2 | length 89.8
  Top Layer w8: S2.2 451.75,3310.3 R4.2
NRST: C9.2 S4.2 U2.7 | length 1815.1
  Top Layer w8: S4.2 458.08,2750.74 C9.2 538.25,2751.15 v1(538.25,2907.31) ; v1(1207.87,3623.33) 1207.87,3466.35 1276.69,3397.53 U2.7
  Bottom Layer w8: v1(538.25,2907.31) 538.25,3388.79 783.71,3634.26 1195.18,3634.26 1206.11,3623.33 v1(1207.87,3623.33)
OPA_N: C28.2 R17.1 R21.2 R29.1 R35.1 R41.1 R47.1 | length 441.7
  Top Layer w10: R21.2 C28.2 564.13,2175.44 R17.1@573.04,2184.36 ; R29.1@568.61,2481.12 573.04,2476.69 R41.1 R35.1 R47.1 R17.1@573.04,2184.36 ; R17.1 572.9,2175.53 R17.1@573.04,2175.68 ; R17.1@573.04,2175.44 R17.1@573.04,2175.68 ; R17.1@573.04,2175.68 573.04,2179.9 R17.1@573.04,2184.36
OPA_P: C26.2 R10.2 R16.2 R17.2 R34.1 R46.1 | length 500.8
  Top Layer w10: R10.2 C26.2 R16.2 R17.2 R17.2@638.14,2180.06 ; R17.2@638.14,2176.23 R17.2@638.14,2180.06 ; R34.1@646.28,2479.79 643.36,2476.87 R46.1 638.14,2357.8 R17.2@638.14,2180.06
PA0: U2.14
PA1: U2.15
PA2: P3.1 U2.16 | length 886.7
  Top Layer w8: U2.16 1099.53,3297.5 1189.62,3207.41 v1(1189.62,3155.74)
  Bottom Layer w8: v1(1189.62,3155.74) 1493.52,3155.74 1631.56,3017.7 P3.1
PA3: P3.3 U2.17 | length 970.3
  Top Layer w8: U2.17 1058.27,3259.51 1102.68,3215.09 1102.68,3129.48 1132.9,3099.26 v1(1194.55,3099.26)
  Bottom Layer w8: v1(1194.55,3099.26) 1463.85,3099.26 1645.41,2917.7 P3.3
PA4: U2.20
PA5: R47.2 U2.21 | length 1418.5
  Top Layer w8: v2(470.84,2300.8) 473.06,2303.02 R47.2 ; v1(826.8,3147.83) 859.74,3180.77 U2.21
  Bottom Layer w8: v2(470.84,2300.8) 413.94,2357.7 413.94,2543.38 481.74,2611.19 706.76,2611.19 799.79,2704.22 799.79,3120.82 v1(826.8,3147.83)
PA6: R35.2 U2.22 | length 1287.7
  Top Layer w8: v2(479.15,2366.62) 508.81,2366.62 R35.2 ; v1(830.52,3102.53) 889.07,3161.08 U2.22
  Bottom Layer w8: v2(479.15,2366.62) 440.95,2404.82 440.95,2533.13 495.23,2587.41 717.71,2587.41 830.52,2700.22 v1(830.52,3102.53)
PA7: R46.2 U2.23 | length 951.1
  Top Layer w8: R46.2 707.09,2366.12 v2(731.61,2366.12) ; v1(953.61,3129.13) 965.16,3140.67 1015.06,3140.67 U2.23
  Bottom Layer w8: v2(731.61,2366.12) 953.61,2588.12 v1(953.61,3129.13)
PA8: R25.1 R26.2 U2.41 | length 863
  Top Layer w8: R26.2 v2(1081.26,2350.38) R25.1 ; v1(1233.11,2710.65) 1233.11,2777.69 1257.01,2801.6 U2.41
  Bottom Layer w8: v2(1081.26,2350.38) 1118.62,2350.38 1233.11,2464.87 1233.11,2567.23 1233.11,2571.23 ccw(c1221.61,2571.23) 1221.61,2582.73 1210.49,2582.73 cw(c1210.49,2594.23) 1210.49,2605.73 1221.61,2605.73 ccw(c1221.61,2617.23) 1233.11,2617.23 1233.11,2668.24 v1(1233.11,2710.65)
PA9: P2.2 R37.1 R38.2 U2.42 | length 1729.2
  Top Layer w8: R38.2 v2(1081.26,2288.17) R37.1 ; v1(1262.35,2689.44) 1262.35,2772.9 1276.69,2787.25 U2.42
  Bottom Layer w8: v2(1081.26,2288.17) 1262.35,2469.25 v1(1262.35,2689.44) 1319.34,2689.44 1614.39,2394.38 1834.71,2394.38 1844.29,2403.96 1844.29,2491.23 P2.2
PA10: P2.4 U2.43 | length 963.1
  Top Layer w8: U2.43 1296.38,2812.33 1296.38,2629.81 1528.82,2397.37 1850.43,2397.37 P2.4
PA11: P1.A7 P1.B7 U2.44 | length 1617.9
  Top Layer w8: U2.44 1316.79,2879.76 1316.79,2856.41 1318.41,2854.8 1318.41,2698.82 1396.83,2620.39 1575.08,2620.39 1636.46,2681.77 1636.46,2964.85 1735.61,3063.99 1735.61,3433.78 1765.14,3463.31 1806.74,3463.31 1819.08,3463.31 1819.52,3462.87 1857.16,3462.87 P1.B7 1901.47,3460.97 1908.42,3467.92 1908.42,3492.74 1900.83,3500.34 P1.A7
PA12: P1.A6 P1.B6 U2.45 | length 1577.4
  Top Layer w8: U2.45 1335.02,2879.76 1335.02,2856.41 1333.41,2854.8 1333.41,2705.03 1403.05,2635.39 1568.87,2635.39 1621.46,2687.98 1621.46,2971.07 1720.61,3070.21 1720.61,3439.99 1758.92,3478.31 1796.92,3478.31 ; P1.A6 1857.16,3478.74 1819.52,3478.74 1819.08,3478.31 1812.91,3478.31 ; P1.B6 1811.42,3520.02 1806.74,3515.33 1806.74,3488.13 ; 1796.92,3478.31 1806.74,3488.13 ; 1796.92,3478.31 1806.74,3478.31 ; 1806.74,3478.31 1812.91,3478.31 ; 1806.74,3478.31 1806.74,3484.48 ; 1806.74,3484.48 1806.74,3488.13 ; 1806.74,3484.48 1812.91,3478.31
PA13: P2.3 U2.46 | length 764.3
  Top Layer w8: U2.46 1355.43,2734.66 1397.56,2692.53 v5(1494.76,2692.53)
  Bottom Layer w8: v5(1494.76,2692.53) 1494.76,2593.45 1646.92,2441.29 P2.3
PA14: P2.1 U2.49 | length 620.3
  Top Layer w8: U2.49 1518.21,2964.23 1549.01,2933.44 v5(1549.01,2712.75)
  Bottom Layer w8: v5(1549.01,2712.75) 1720.47,2541.29 P2.1
PA15: U2.50
PB0: R34.2 U2.26 | length 800.8
  Top Layer w8: R34.2 702.61,2484.08 704.87,2486.35 v2(745.48,2486.35) ; v1(929.44,3077.12) 933.77,3077.12 938.99,3082.34 U2.26
  Bottom Layer w8: v2(745.48,2486.35) 929.44,2670.3 v1(929.44,3077.12)
PB1: U2.27
PB3: U2.55
PB4: U2.56
PB5: U2.57
PB6: U2.58
PB7: U2.59
PB8: P4.2 U2.61 | length 2090.8
  Top Layer w10: U2.61 1555.89,3200.45 v1(1586.44,3231)
  Bottom Layer w10: P4.2 340.78,3974.05 1323.57,3974.05 1539.55,3758.07 1539.55,3325.75 1583.76,3281.54 1583.76,3233.68 v1(1586.44,3231)
PB9: P4.1 U2.62 | length 2095.1
  Top Layer w10: U2.62 1478.89,3220.48 1534.74,3220.48 v1(1554,3239.74)
  Bottom Layer w10: P4.1 273.42,3941.4 1293.83,3941.4 1515.55,3719.69 1515.55,3278.2 v1(1554,3239.74)
PB10: R41.2 U2.29 | length 1062
  Top Layer w8: v2(476.43,2425.11) 510.32,2425.11 R41.2 ; v1(875.52,3005.27) 893.54,3023.29 U2.29
  Bottom Layer w8: v2(476.43,2425.11) 476.43,2533.99 510.03,2567.6 735.22,2567.6 855.61,2687.98 855.61,2985.36 v1(875.52,3005.27)
PB11: R29.2 U2.30 | length 910.8
  Top Layer w8: v1(898.44,2982) 920.04,3003.6 U2.30
  Top Layer w10: R29.2 521.04,2491.64 515.56,2497.12 v2(515.56,2514.12)
  Bottom Layer w8: v2(515.56,2514.12) 549.22,2547.78 755.97,2547.78 876.23,2668.04 876.23,2959.79 v1(898.44,2982)
PB12: U2.33
PB13: R31.1 R32.2 U2.34 | length 863
  Top Layer w8: R32.2 v2(1081.26,2480.8) R31.1 ; v1(1106.72,2766.4) 1119.12,2778.8 1119.12,2880.4 U2.34
  Bottom Layer w8: v2(1081.26,2480.8) 1106.72,2506.26 1106.72,2562.79 1106.72,2566.79 ccw(c1095.22,2566.79) 1095.22,2578.29 1069.64,2578.29 cw(c1069.64,2589.79) 1069.64,2601.29 1100.66,2601.29 ccw(c1100.66,2612.79) 1100.66,2624.29 1069.64,2624.29 cw(c1069.64,2635.79) 1069.64,2647.29 1104.87,2647.29 ccw(c1104.87,2658.79) 1104.87,2670.29 1071.92,2670.29 cw(c1071.92,2681.79) 1071.92,2693.29 1095.22,2693.29 ccw(c1095.22,2704.79) 1106.72,2704.79 1106.72,2728.65 v1(1106.72,2766.4)
PB14: R43.1 R44.2 U2.35 | length 859.6
  Top Layer w8: R44.2 v2(1081.26,2414.59) R43.1 ; v1(1138.05,2738.07) 1138.9,2738.93 U2.35
  Bottom Layer w8: v2(1081.26,2414.59) 1117.3,2414.59 1129.23,2426.53 1138.05,2435.34 1138.05,2502.66 1138.05,2529.66 cw(c1149.55,2529.66) 1149.55,2541.16 1154.99,2541.16 ccw(c1154.99,2552.66) 1154.99,2564.16 1137.66,2564.16 cw(c1137.66,2575.66) 1137.66,2587.16 1154.99,2587.16 ccw(c1154.99,2598.66) 1154.99,2610.16 1137.66,2610.16 cw(c1137.66,2621.66) 1137.66,2633.16 1154.99,2633.16 ccw(c1154.99,2644.66) 1154.99,2656.16 1149.55,2656.16 cw(c1149.55,2667.66) 1138.05,2667.66 1138.05,2702.84 v1(1138.05,2738.07)
PB15: U2.36
PC0: S2.1 U2.8 | length 1648.8
  Top Layer w8: S2.1 243.26,3203.83 v1(573.35,3203.83) ; v1(1168.49,3593.58) 1193.87,3568.2 1193.87,3460.55 1257.01,3397.41 U2.8
  Bottom Layer w8: v1(573.35,3203.83) 573.35,3382.08 805.72,3614.45 1147.63,3614.45 v1(1168.49,3593.58)
PC1: P5.7 U2.9 | length 1262.7
  Top Layer w8: v1(1157,3737) 1157,3676.49 1144.49,3663.99 1144.49,3580.87 1179.65,3545.72 1179.65,3454.97 1237.32,3397.3 U2.9
  Bottom Layer w8: P5.7 494.27,3734.66 595.51,3734.66 708.73,3847.89 1046.11,3847.89 v1(1157,3737)
PC2: P5.9 U2.10 | length 1100.4
  Top Layer w8: v1(1127,3717) 1127,3574.35 1165.65,3535.7 1165.65,3449.17 1217.64,3397.18 U2.10
  Bottom Layer w8: P5.9 625.56,3685.34 770.65,3830.43 1013.57,3830.43 v1(1127,3717)
PC3: U2.11
PC4: U2.24
PC5: U2.25
PC6: U2.37
PC7: U2.38
PC8: U2.39
PC9: U2.40
PC10: P3.2 U2.51 | length 470.4
  Top Layer w8: U2.51 1585.47,3003.6 v1(1638.71,3056.83)
  Bottom Layer w8: v1(1638.71,3056.83) 1658.4,3076.53 1835.53,3076.53 P3.2
PC11: P3.4 U2.52 | length 470
  Top Layer w8: U2.52 1563.81,3023.29 v1(1576.48,3035.96)
  Bottom Layer w8: v1(1576.48,3035.96) 1642.42,2970.02 1842.03,2970.02 P3.4
PC12: U2.53
PC13: U2.2
PC14: U2.3
PC15: U2.4
PD0: C4.2 U2.5 Y1.1 | length 294.5
  Top Layer w8: U2.5 1316.06,3511.42 1352.5,3547.86 Y1.1 1356.44,3611.35 C4.2
PD1: C5.2 U2.6 Y1.3 | length 320.9
  Top Layer w8: C5.2@1263.73,3616.59 1263.73,3616.39 1249.62,3602.28 1249.42,3602.28 1228.32,3581.18 1228.32,3506.69 1261.95,3473.06 1269.83,3473.06 1296.38,3446.5 U2.6
PD2: U2.54
VBAT: C6.1 R12.2 U2.1 | length 875.6
  Top Layer w8: U2.1 1394.8,3399.45 1432.92,3437.57 1432.92,3438.55 1447.23,3452.86 C6.1
  Top Layer w20: R12.2 1277.98,3956.28 1303.77,3930.49 1303.77,3814.77 1523.01,3595.52 1523.01,3485.81 1497.5,3460.3 1455.65,3460.3 C6.1
VDDA: C8.1 R5.2 R7.2 U2.13 | length 716.5
  Top Layer w8: C8.1@1110.37,3449.94 1121.76,3438.55 1158.58,3401.73 U2.13
  Top Layer w20: C8.1 1102.43,3456.89 1069.2,3456.89 1057.49,3468.61 1057.49,3750.48 1094.34,3787.33 1183.4,3787.33 1195.12,3799.05 R5.2 R7.2
VIO: C10.2 R5.1 U2.32 | length 1381.1
  Top Layer w8: C10.2 932.82,2920.46 976.59,2964.23 U2.32
  Top Layer w20: C10.2 932.82,2855.42 954.7,2833.54 v2(1047.19,2833.54) ; v2(1046.32,3374.55) 1021.73,3399.14 1021.73,3781.01 1071.92,3831.2 R5.1
  Bottom Layer w20: v2(1046.32,3374.55) 1046.32,2834.41 v2(1047.19,2833.54)
pads on no net: ?.0 P1.A8 P1.B8 S1.0 S1.2 U1. U2.0

## Polygon pours and split planes (outlines as drawn)
GND on Top Layer "GND" (hatched Horizontal grid 8 track 8, remove dead copper, pour order 0): 2165.35,4488.19 2165.35,1857.88 0,1857.88 0,4488.19
GND on Bottom Layer "GND" (hatched Horizontal grid 8 track 8, remove dead copper, pour order 1): 0,4488.56 0,1857.88 2165.35,1857.88 2165.35,4488.56

## Keep-outs
Keep-Out Layer:
  lines w10: 118.11,4488.19 2047.26,4488.19 cw(c2047.24,4370.08) 2165.35,4370.08 2165.35,118.11 cw(c2047.24,118.11) 2047.24,0 118.11,0 cw(c118.11,118.11) 0,118.11 0,4369.87 cw(c118.33,4369.87) 118.33,4488.19

## Other copper
Multi-Layer:
  pour cut-out: 0.08,-2.26 0.08,1850.15 2165.43,1850.15 2165.43,-2.26

## Silkscreen, mask and mechanical layers (free items; w line width, h text height)
Top Overlay:
  circle w30: c1085.17,924.67 r10
  lines w20: 731.62,571.12 cw(c1085.17,924.67) 731.62,1278.22 ; 802.33,641.83 cw(c1085.17,924.67) 802.33,1207.51 ; 873.04,712.54 cw(c1085.17,924.67) 873.04,1136.8 ; 943.75,783.25 cw(c1085.17,924.67) 943.75,1066.09 ; 1014.46,853.96 cw(c1085.17,924.67) 1014.46,995.38 ; 1155.88,853.96 ccw(c1085.17,924.67) 1155.88,995.38 ; 1226.59,783.25 ccw(c1085.17,924.67) 1226.59,1066.09 ; 1297.31,712.54 ccw(c1085.17,924.67) 1297.31,1136.8 ; 1368.02,641.83 ccw(c1085.17,924.67) 1368.02,1207.51 ; 1438.73,571.12 ccw(c1085.17,924.67) 1438.73,1278.22
  text "ON" at 880.93,4267.05 h35
  text "OFF" at 1017.1,4267.05 h35
  text "PB9" at 122.35,4237.14 h35 r270
  text "PB8" at 222.2,4237.14 h35 r270
  text "GND" at 322.04,4237.14 h35 r270
  text "3V3" at 421.88,4237.14 h35 r270
  text "BOOT0" at 222.2,4019.75 h35 r270
  text "LED2" at 521.73,3984.76 h35 r270
  text "LED1" at 421.88,3973.09 h35 r270
  text "3V3" at 122.35,3949.77 h35 r270
  text "GND" at 322.04,3949.77 h35 r270
  text "3V3" at 122.35,3626.79 h35 r270
  text "BOOT1" at 222.2,3626.79 h35 r270
  text "GND" at 322.04,3626.79 h35 r270
  text "PC1" at 421.88,3626.79 h35 r270
  text "PC2" at 521.73,3626.79 h35 r270
  text "PA2" at 1622.88,2997.27 h35
  text "PC10" at 1963.16,2997.27 h35
  text "PA3" at 1622.88,2896.23 h35
  text "PC11" at 1963.16,2896.23 h35
  text "GND" at 1622.88,2795.19 h35
  text "GND" at 1963.16,2795.19 h35
  text "3V3" at 1622.88,2694.15 h35
  text "3V3" at 1963.16,2694.15 h35
  text "CH32FVx0xR-NFC-EVT-R0-1v2" at 690.49,2628.66 h35
  text "SWCK" at 1581.37,2520.11 h35
  text "TXD" at 1963.16,2520.11 h35
  text "SWIO" at 1587.2,2419.62 h35
  text "RXD" at 1963.16,2419.62 h35
  text "GND" at 1616.36,2319.13 h35
  text "GND" at 1963.16,2319.13 h35
  text "3V3" at 1616.36,2218.64 h35
  text "3V3" at 1963.16,2218.64 h35
  text "+5V" at 1616.36,2118.15 h35
  text "+5V" at 1963.16,2118.15 h35
Mechanical 1:
  lines w10: 118.11,4488.19 2047.16,4488.19 cw(c2047.16,4370.08) 2165.27,4370.08 2165.27,118.11 ; 118.19,4488.19 ccw(c118.19,4370.08) 0.08,4370.08 0.08,118.11 ccw(c118.19,118.11) 118.19,0 2047.32,0 ccw(c2047.32,118.11) 2165.43,118.11

## Text inside footprints (layer, text, board x,y; h text height)
D1: Top Overlay "+" at 864.15,3748.31 h40 r270
D2: Top Overlay "+" at 864.15,3679.78 h40 r270
PWR1: Top Overlay "+" at 1469.46,4232.22 h40 r270